# EAGLE board StepperController_v1-0 (EAGLE 7.5.0)
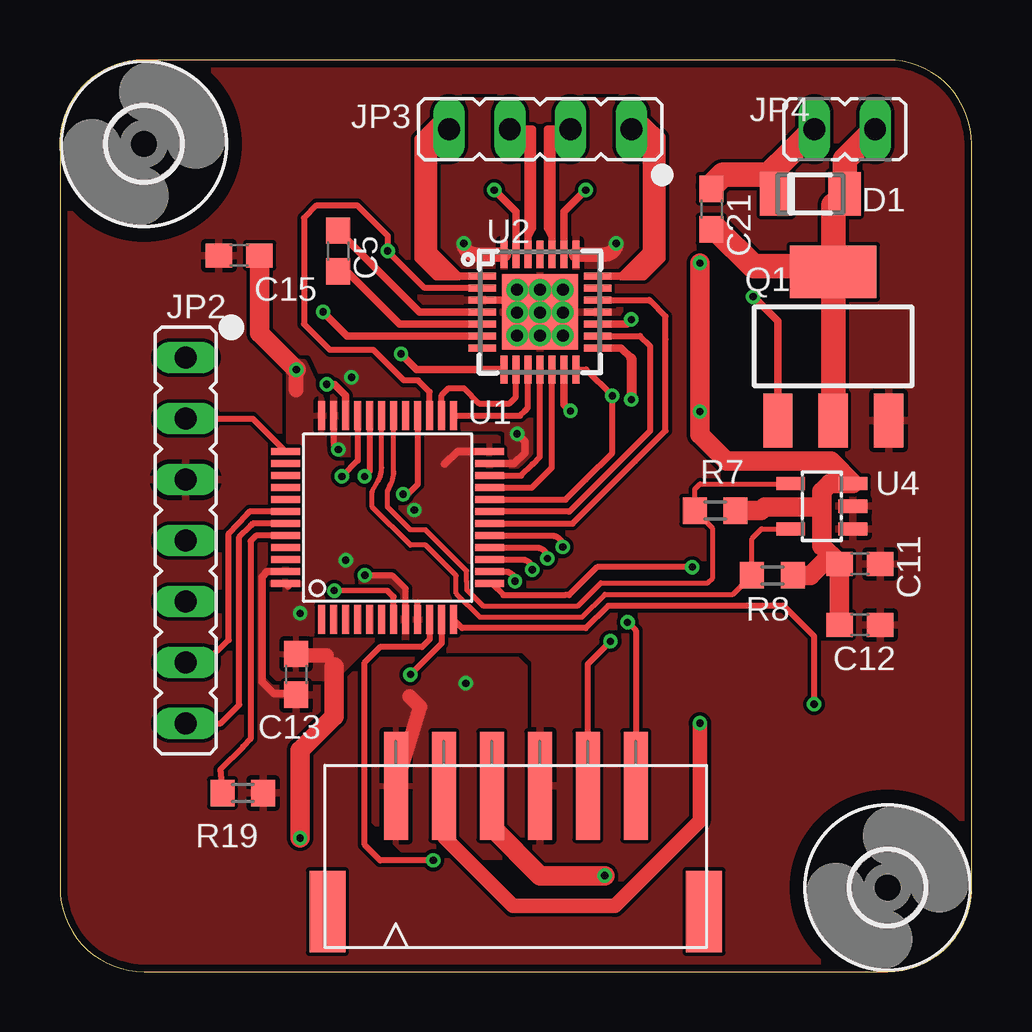
[diagram p0: board, top side]
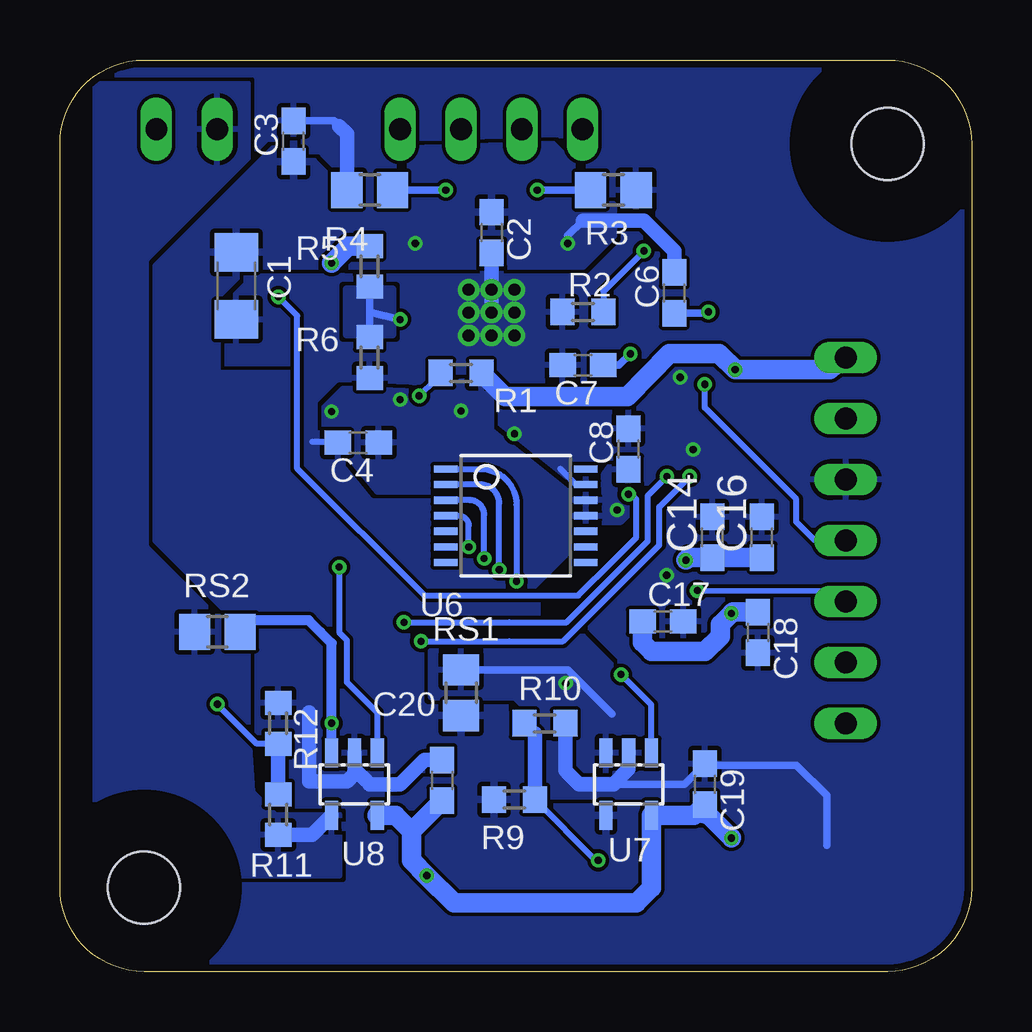
[diagram p1: board, bottom side, seen from below]

Size 38 x 38 mm. Coordinates in mm from the lower left corner, seen from the top.
Outline: 0,34.5 0,3.5 arc90 3.5,0 34.5,0 arc90 38,3.5 38,34.5 arc90 34.5,38 3.5,38 arc90 0,34.5
Copper layers (1*16): Top 0.035mm / dielectric 1.5mm / Bottom 0.035mm
Design rules "PCB-POOL Standard": minimum track width 0.15mm, minimum drill 0.3mm, track to track 0.15mm, track to pad 0.15mm, pad to pad 0.15mm, via to via 0.15mm, smd to smd 0.15mm, copper to edge 0.3mm, drill to drill 0.2mm, minimum pad ring 0.2mm, minimum via ring 0.15mm, stop-mask expansion 0.075mm, vias tented up to drill 0mil, thermal gap 0.2mm

## Footprints (pad centres in the part's own frame; a part is rotated, then mirrored left to right if it is on the bottom)
C1206 = smd 1.6 x 1.8: 1 -1.4,0; 2 1.4,0
C0603 = smd 1.1 x 1: 1 -0.85,0; 2 0.85,0
SOD123F = smd 1.34 x 1.8: A 1.43,0; C -1.43,0
3,0 = hole 3: 0,0
S6B-PH-SM4-TB = smd 1 x 4.5: 1 5,-6.75; 2 3,-6.75; 3 1,-6.75; 4 -1,-6.75; 5 -3,-6.75; 6 -5,-6.75 | smd 1.5 x 3.4: M1 -7.85,-1.5; M2 7.85,-1.5
JP7 = drill 0.914 long: 1 -7.62,0; 2 -5.08,0; 3 -2.54,0; 4 0,0; 5 2.54,0; 6 5.08,0; 7 7.62,0
JP4 = drill 0.914 long: 1 -3.81,0; 2 -1.27,0; 3 1.27,0; 4 3.81,0
JP1Y = drill 0.914 long: 1 0,-1.27; 2 0,1.27
SOT223 = smd 1.219 x 2.235: 1 -2.311,-3.099; 2 0,-3.099; 3 2.311,-3.099 | smd 3.6 x 2.2: 4 0,3.099
R0603 = smd 1 x 1.1: 1 -0.85,0; 2 0.85,0
R0805 = smd 1.3 x 1.5: 1 -0.95,0; 2 0.95,0
LQFP48 = smd 0.3 x 1.2: 1 -2.75,-4.25; 2 -2.25,-4.25; 3 -1.75,-4.25; 4 -1.25,-4.25; 5 -0.75,-4.25; 6 -0.25,-4.25; 7 0.25,-4.25; 8 0.75,-4.25; 9 1.25,-4.25; 10 1.75,-4.25; 11 2.25,-4.25; 12 2.75,-4.25; 25 2.75,4.25; 26 2.25,4.25; 27 1.75,4.25; 28 1.25,4.25; 29 0.75,4.25; 30 0.25,4.25; 31 -0.25,4.25; 32 -0.75,4.25; 33 -1.25,4.25; 34 -1.75,4.25; 35 -2.25,4.25; 36 -2.75,4.25 | smd 1.2 x 0.3: 13 4.25,-2.75; 14 4.25,-2.25; 15 4.25,-1.75; 16 4.25,-1.25; 17 4.25,-0.75; 18 4.25,-0.25; 19 4.25,0.25; 20 4.25,0.75; 21 4.25,1.25; 22 4.25,1.75; 23 4.25,2.25; 24 4.25,2.75; 37 -4.25,2.75; 38 -4.25,2.25; 39 -4.25,1.75; 40 -4.25,1.25; 41 -4.25,0.75; 42 -4.25,0.25; 43 -4.25,-0.25; 44 -4.25,-0.75; 45 -4.25,-1.25; 46 -4.25,-1.75; 47 -4.25,-2.25; 48 -4.25,-2.75
QFN-28-5MM = smd 1.15 x 0.3: 1 -2.4,1.5; 2 -2.4,1; 3 -2.4,0.5; 4 -2.4,0; 5 -2.4,-0.5; 6 -2.4,-1; 7 -2.4,-1.5; 15 2.4,-1.5; 16 2.4,-1; 17 2.4,-0.5; 18 2.4,0; 19 2.4,0.5; 20 2.4,1; 21 2.4,1.5 | smd 0.3 x 1.15: 8 -1.5,-2.4; 9 -1,-2.4; 10 -0.5,-2.4; 11 0,-2.4; 12 0.5,-2.4; 13 1,-2.4; 14 1.5,-2.4; 22 1.5,2.4; 23 1,2.4; 24 0.5,2.4; 25 0,2.4; 26 -0.5,2.4; 27 -1,2.4; 28 -1.5,2.4 | smd 3.15 x 3.15: 29 0,0
SOT23-5L = smd 0.55 x 1.2: 1 -0.95,-1.3; 2 0,-1.3; 3 0.95,-1.3; 4 0.95,1.3; 5 -0.95,1.3
TSSOP14 = smd 0.305 x 0.991: 1 -1.95,-2.918; 2 -1.3,-2.918; 3 -0.65,-2.918; 4 0,-2.918; 5 0.65,-2.918; 6 1.3,-2.918; 7 1.95,-2.918; 8 1.95,2.918; 9 1.3,2.918; 10 0.65,2.918; 11 0,2.918; 12 -0.65,2.918; 13 -1.3,2.918; 14 -1.95,2.918

## Placement (x,y rotation side)
C1  4.7uF  [C1206]  30.65,28.58 270 bottom
C2  0.1uF  [C0603]  20.01,30.8 270 bottom
C3  0.1uF  [C0603]  28.27,34.62 90 bottom
C4  0.22uF  [C0603]  25.57,22.05 180 bottom
C5  0.1uF  [C0603]  11.6,30.04 270 top
C6  0.1uF  [C0603]  12.39,28.29 90 bottom
C7  0.22uF  [C0603]  16.2,25.27 180 bottom
C8  100nF  [C0603]  14.29,21.78 90 bottom
C11  100nF  [C0603]  33.34,16.99 0 top
C12  10uF  [C0603]  33.34,14.45 0 top
C13  100nF  [C0603]  9.85,12.39 270 top
C14  100nF  [C0603]  10.8,18.11 90 bottom
C15  100nF  [C0603]  7.47,29.85 180 top
C16  4.7uF  [C0603]  8.74,18.11 90 bottom
C17  1uF  [C0603]  12.87,14.59 0 bottom
C18  10nF  [C0603]  8.9,14.14 270 bottom
C19  100nF  [C0603]  11.12,7.81 270 bottom
C20  100nF  [C0603]  22.07,7.97 270 bottom
C21  1nF  [C0603]  27.15,31.78 270 top
D1  SDM1U100S1F-7  [SOD123F]  31.28,32.42 0 top
H1  MOUNT-HOLE3.0  [3,0]  34.5,3.5 0 top
H2  MOUNT-HOLE3.0  [3,0]  3.5,34.5 0 top
JP1  BOARDINTERFACE  [S6B-PH-SM4-TB]  19,1 180 top
JP2  ST-LINK_UART  [JP7]  5.25,17.97 270 top
JP3  NEMA17  [JP4]  20.02,35.12 180 top
JP4  MC33873  [JP1Y]  32.71,35.12 270 top
Q1  STN4NF03  [SOT223]  32.23,26.07 0 top
R1  100k  [R0603]  21.28,24.95 0 bottom
R2  100k  [R0603]  16.2,27.5 0 bottom
R3  90mOhm+/-1%  [R0805]  14.93,32.58 180 bottom
R4  90mOhm+/-1%  [R0805]  25.09,32.58 0 bottom
R5  20k+/-1%  [R0603]  25.09,29.4 270 bottom
R6  7.5k+/-1%  [R0603]  25.09,25.59 270 bottom
R7  10k  [R0603]  27.31,19.22 0 top
R8  10k  [R0603]  29.69,16.52 0 top
R9  60.4k+/-1%  [R0603]  19.06,7.17 180 bottom
R10  12.1k+/-1%  [R0603]  17.79,10.35 180 bottom
R11  60.4k+/-1%  [R0603]  28.9,6.54 270 bottom
R12  40.2k+/-1%  [R0603]  28.9,10.35 270 bottom
R19  10k  [R0603]  7.63,7.45 180 top
RS1  0.05+/-1%  [R0805]  21.28,11.62 90 bottom
RS2  0.05+/-1%  [R0805]  31.44,14.16 0 bottom
U1  STM32L431CX  [LQFP48]  13.66,18.92 0 top
U2  A4988  [QFN-28-5MM]  20.01,27.5 0 top
U4  AD7315A  [SOT23-5L]  31.76,19.4 90 top
U6  AS5047D  [TSSOP14]  19,19 270 bottom
U7  CS30A  [SOT23-5L]  14.29,7.81 180 bottom
U8  CS30C  [SOT23-5L]  25.73,7.81 180 bottom

## Library data of the parts
C1-C8 C11-C21 R1-R12 R19 RS1 RS2 = resistor
D1 JP1-JP4 Q1 U1 U2 U4 U6-U8 = ()_StepperMotor_Library
H1 H2 = holes

## Nets
A4988_DIR: U1.18 U2.19
A4988_MS1: U1.26 U2.9
A4988_MS2: U1.25 U2.10
A4988_MS3: U1.22 U2.11
A4988_NENABLE: R2.2 U1.27 U2.2
A4988_NRESET: U1.21 U2.12
A4988_NSLEEP: R1.1 U1.20 U2.14
A4988_STEP: U1.19 U2.16
BOARD_12V: JP1.1 RS1.2 U7.3
CAN1_RX: JP1.6 U1.32
CAN1_TX: JP1.5 U1.33
FAN_CURRENT: U1.13 U8.1
FAN_POWER: C21.1 D1.C JP4.1 R11.2 RS2.1 U8.4
FAN_PWM: Q1.1 U1.28
FAN_VOLTAGE: R11.1 R12.2 U1.12
GND: C1.2 C2.2 C3.2 C4.2 C7.2 C8.2 C11.2 C12.2 C13.2 C14.2 C15.2 C16.2 C17.2 C18.2 C19.1 C20.1 JP1.4 JP2.3 Q1.3 R2.1 R3.1 R4.1 R6.2 R10.1 R12.1 R19.1 U1.8 U1.23 U1.35 U1.47 U2.3 U2.18 U2.29 U4.1 U4.2 U6.13 U7.2 U8.2
I2C1_SCL: R7.1 U1.30 U4.4
I2C1_SDA: R8.1 U1.31 U4.5
N$1: U1.38
N$2: U1.29
N$3: U1.45
N$4: U1.46
N$5: U1.5
N$6: U1.6
N$8: R19.2 U1.44
N$9: U1.1
N$10: R3.2 U2.27
N$11: C6.1 U2.6
N$12: C5.1 U2.4
N$13: C5.2 U2.5
N$14: R4.2 U2.23
N$15: C7.1 U2.8
N$16: R5.2 R6.1 U2.17
N$18: U6.7
N$19: U6.6
N$20: U6.14
N$21: U6.10
N$22: U6.9
N$23: U6.8
N$24: U6.5
N$32: C21.2 D1.A JP4.2 Q1.2 Q1.4
REG_3P3V: C4.1 C8.1 C11.1 C12.1 C13.1 C14.1 C15.1 C16.1 C17.1 C18.1 C19.2 C20.2 JP1.3 JP2.1 R1.2 R5.1 R7.2 R8.2 U1.9 U1.24 U1.36 U1.48 U2.13 U2.15 U4.3 U6.11 U6.12 U7.5 U8.5
REG_5V: JP1.2 RS2.2 U8.3
SPI1_MISO: U1.16 U6.3
SPI1_MOSI: U1.17 U6.4
SPI1_NSS: U1.14 U6.1
SPI1_SCK: U1.15 U6.2
STEPPER_1A: JP3.2 U2.24
STEPPER_1B: JP3.1 U2.21
STEPPER_2A: JP3.3 U2.26
STEPPER_2B: JP3.4 U2.1
STEPPER_CURRENT: U1.11 U7.1
STEPPER_POWER: C1.1 C2.1 C3.1 C6.2 R9.2 RS1.1 U2.22 U2.28 U7.4
STEPPER_VOLTAGE: R9.1 R10.2 U1.10
SYS_JTCK-SWCLK: JP2.2 U1.37
SYS_JTMS-SWDIO: JP2.4 U1.34
SYS_NRESET: JP2.5 U1.7
USART1_RX: JP2.7 U1.43
USART1_TX: JP2.6 U1.42

## Tracks (layer width: path | path; a pad name or v marks a point on that pad's centre or on a via)
A4988_DIR
  Top 0.254: U1.18 21.35,18.67 21.37,18.67 23.98,21.28 25.25,22.55 25.25,26.36 25.25,27.31 24.61,27.95 24.57,28 U2.19
A4988_MS1
  Top 0.254: U1.26 15.91,24.03 16.2,24.32 16.84,24.32 17.47,23.68 18.74,23.68 19.01,23.95 U2.9
A4988_MS2
  Top 0.254: U1.25 19.18,23.17 19.38,23.37 19.51,23.5 U2.10
A4988_MS3
  Top 0.254: U1.22 19.22,20.67 19.69,21.14 20.01,21.46 U2.11
A4988_NENABLE  (via drill 0.3)
  Top 0.254: U2.2 15.2,28.5 v13.66,30.04 13.66,30.67 12.39,31.94 10.7,31.94 10.17,31.41 10.17,27 11.26,25.91 11.44,25.91 13.06,25.91 14.34,24.64 14.93,24.64 15.41,24.16 U1.27
  Bottom 0.254: v13.66,30.04 15.35,28.34 R2.2
A4988_NRESET
  Top 0.254: U1.21 19.67,20.17 20.33,20.83 20.51,21.01 U2.12
A4988_NSLEEP  (via drill 0.3)
  Top 0.254: U2.14 21.93,25.09 v23.03,24 23.03,21.62 21.91,20.51 21.08,19.67 U1.20
  Bottom 0.254: 22.23,24.64 22.39,24.64 v23.03,24
  Bottom 0.305: 22.23,24.64 R1.1
A4988_STEP
  Top 0.254: U2.16 24.18,26.5 24.61,26.07 24.61,25.25 24.61,25.09 24.61,22.55 24.45,22.39 21.24,19.17 21.21,19.17 U1.19
BOARD_12V  (via drill 0.3)
  Top 0.61: JP1.1 15,11.04 14.57,11.46
  Bottom 0.305: RS1.2 16.82,12.57 15,10.75
  other vias: 16.91,12.02
  pour Top: 16.51,5.08 14.29,5.08 13.02,6.35 13.02,12.7 13.34,13.02 19.05,13.02 19.37,12.7 19.37,5.4 18.73,4.76 16.83,4.76
  pour Bottom: 13.34,8.89 13.34,11.11 16.19,13.97 22.54,13.97 22.54,11.75 22.54,11.43 19.05,11.43 17.14,9.53 17.14,8.26 16.83,7.94 14.61,7.94 14.29,7.94
CAN1_RX  (via drill 0.3)
  Top 0.254: U1.32 12.91,20.85 v12.7,20.64 | v23.66,14.56 24,14.22 JP1.6
  Bottom 0.254: v23.66,14.56 19.27,14.56 16.88,14.56 13.49,17.94 13.49,19.84 v12.7,20.64
CAN1_TX  (via drill 0.3)
  Top 0.254: U1.33 12.41,21.3 v11.75,20.64 | JP1.5 22,12.82 v22.95,13.76
  Bottom 0.254: v22.95,13.76 19.27,13.76 17.03,13.76 13.02,17.78 13.02,19.37 v11.75,20.64
FAN_CURRENT  (via drill 0.3)
  Top 0.254: v26.36,16.86 22.39,16.86 21.22,15.69 21.04,15.69 18.5,15.69 18.48,15.69 18,16.17
  Top 0.305: U1.13 18,16.17
  Bottom 0.254: v26.36,16.86 26.36,14.14 26.04,13.82 26.04,12.07 24.77,10.8 U8.1
FAN_POWER
  Top 0.61: 30.49,34.16 29.85,33.53 D1.C | C21.1 27.15,32.73
  Top 1.016: JP4.1 30.49,34.16 29.54,33.21 27.63,33.21 27.15,32.73
  Bottom 0.61: R11.2 27.5,5.69 U8.4
  pour Bottom (rank 3): 26.36,4 36.52,4 36.52,37.02 30.17,37.02 30.17,33.21 33.98,29.4 33.98,17.97 30.17,14.16 30.17,10.35 30,7.5 29.04,6.54 26.36,6.54
FAN_PWM  (via drill 0.3)
  Top 0.254: U1.28 14.91,20.31 14.5,19.9 v14.3,19.9
  Top 0.305: v28.9,28.13 29.92,27.11 Q1.1
  Bottom 0.254: v28.9,28.13 28.11,27.34 28.11,20.96 22.81,15.67 16.4,15.67 14.92,17.14 13.97,18.1 13.97,18.73 13.97,19.68 14.19,19.9 v14.3,19.9
FAN_VOLTAGE  (via drill 0.3)
  Top 0.254: U1.12 16.77,14.31 21.91,14.31 22.84,15.25 30.17,15.25 31.44,13.98 v31.44,11.14
  Bottom 0.254: R12.2 29.8,9.5 v31.44,11.14
  Bottom 0.61: R11.1 R12.2
GND  (via drill 0.3, 0.5)
  Top 0.254: U1.35 11.41,21.94 v11.6,21.76 | U1.8 14.41,15.97 13.87,16.51 v12.71,16.51 v12.71,16.52
  Top 0.305: U1.23 18.93,21.17 19.38,21.62 19.38,22.1 v19.06,22.41 | U1.47 8.64,16.67 8.42,16.45 8.42,12.07 8.9,11.6 9.77,11.6 | U2.3 19.06,28 v19.06,28.42
  Bottom 0.254: C4.2 26.44,22.07 27.47,22.07 | U6.13 16.49,20.3 17.14,20.95
  Bottom 0.305: 25.09,7.81 25.25,7.97 | U7.2 14.29,8.45 | 16.84,8.29 16.94,8.39 | 14.93,7.81 11.97,7.81 C19.1 11.06,8.6 7.31,8.6 6.04,7.33 6.04,5.27 | C3.2 26.57,35.47 26.36,35.25 | 23.82,7.81 23.82,7.79 23.82,7.81
  Bottom 0.61: C20.1 22.81,8.82 23.82,7.81 25.09,7.81 | 25.25,7.97 25.63,8.35 | 25.63,8.35 25.73,8.45 U8.2 | 14.29,8.45 14.93,7.81 16.36,7.81 16.84,8.29 | 16.94,8.39 R10.1 | R4.1 26.04,34.93 26.36,35.25 | C2.2 v20.01,28.42 20.01,27.63 | 27.62,10.79 27.62,7.94 26.04,7.94 25.63,8.35
  other vias: 12.15,24.77 20.96,28.42 20.96,27.47 20.01,27.47 19.06,27.47 19.06,26.52 20.01,26.52 20.96,26.52
  pour Top (rank 6): -1,-1.5 39.79,-1.5 39.29,38.79 -1,38.79
  pour Bottom (rank 6): -1.27,-1.77 40.02,-1.77 40.02,39.31 -1.27,39.31
I2C1_SCL
  Top 0.2: U4.4 30.44,20.33 26.68,20.33 26.46,20.11 R7.1 27.21,18.47 27.21,16.41 27,16.2 22.55,16.2 21.6,15.25 17.63,15.25 16.95,15.92 16.95,16.24 16.95,16.7 15.24,18.41 14.61,18.41 13.65,19.37 13.65,20 13.8,20.34 arc24 13.91,20.84 U1.30
I2C1_SDA
  Top 0.2: U4.5 29.24,18.45 28.84,18.05 R8.1 28.05,15.72 22.71,15.72 21.76,14.77 17.51,14.77 16.52,15.76 16.52,16.5 15.24,17.78 14.61,17.78 13.02,19.37 13.02,20 13.27,20.46 arc29 13.41,21 U1.31
N$8
  Top 0.254: U1.44 8.17,18.17 7.95,17.95 7.95,9.69 7.63,9.37 6.68,8.42 R19.2
N$10  (via drill 0.3)
  Top 0.305: U2.27 19.01,31.67 v18.11,32.58
  Bottom 0.305: v18.11,32.58 R3.2
N$11  (via drill 0.3)
  Top 0.305: U2.6 11.96,26.5 v10.97,27.5
  Bottom 0.305: C6.1 11.02,27.44 v10.97,27.5
N$12
  Top 0.305: U2.4 14.99,27.5 C5.1
N$13
  Top 0.305: C5.2 11.97,29.18 13.66,27.5 14.16,27 U2.5
N$14  (via drill 0.3)
  Top 0.305: U2.23 21.01,31.67 v21.91,32.58
  Bottom 0.305: v21.91,32.58 R4.2
N$15  (via drill 0.3)
  Top 0.305: U2.8 14.87,25.09 v14.22,25.75
  Bottom 0.305: C7.1 14.69,25.27 v14.22,25.75
N$16  (via drill 0.3)
  Top 0.305: U2.17 23.64,27 v23.82,27.18
  Bottom 0.305: v23.82,27.18 25.09,27.5 | R5.2 25.09,27.5 | R6.1 25.09,27.5
  pour Bottom (no thermals): 26.04,28.45 26.04,26.54 24.14,26.54 24.14,28.45
N$32
  Top 0.305: D1.A 32.23,31.94
  Top 0.61: C21.2 27.37,30.93 | 32,29.4 Q1.4
  Top 1.016: JP4.2 32.71,33.85 D1.A | 32.23,31.94 Q1.4 Q1.2 | 27.37,30.93 28.9,29.4 32,29.4
REG_3P3V  (via drill 0.3)
  Top 0.254: U1.9 14.91,15.39
  Top 0.305: U1.24 16.56,21.67 16.04,21.15 | 9.51,16.07 U1.48 | U2.15 23.39,26 23.82,25.57 | v21.28,23.37 21.01,23.64 U2.13
  Top 0.406: 23.82,25.57 v23.82,23.84
  Top 0.61: 9.85,24.23 v9.85,25.09 | 11.12,13.18 9.88,13.18
  Top 0.813: v10.01,5.56 10.01,9.21 11.43,10.64 11.43,12.7 | C15.1 8.32,26.62 v9.85,25.09 | C12.1 C11.1 32.13,17.36 | 31.76,19.38 31.76,20.01 32.1,20.35 U4.3 32.13,21.28 27.79,21.28 26.68,22.39 v26.68,23.34 v26.68,29.54 | 31.76,19.38 31.76,17.73 32.13,17.36 | R8.2 31.28,16.52 32.13,17.36 | R7.2 29.22,19.22 29.38,19.38 31.76,19.38 | JP1.3 18,6.01 20.01,4 v22.71,4
  Bottom 0.305: v23.82,23.84 23.82,23.82 | 11.81,17.25 v11.91,17.15
  Bottom 0.61: C20.2 22.07,7.02 | U8.5 24.75,6.54
  Bottom 0.813: JP2.1 5.91,25.09 v9.85,25.09 10.48,25.73 10.53,25.77 12.59,25.77 14.34,23.98 19.38,23.98 19.45,23.98 R1.2 | C16.1 C14.1 11.81,17.25 v11.91,17.15 | R5.1 25.96,30.25 v26.68,29.54 | C19.2 11.57,6.51 U7.5 13.35,3.48 13.97,2.86 21.57,2.86 v22.71,4 23.34,4.63 23.34,5.85 | v10.01,5.56 11.12,6.67 | 23.34,5.85 C20.2 | U8.5 24,6.51 23.34,5.85 | C18.1 9.95,14.99 v10.01,14.93 10.48,14.46 10.48,13.97 11.11,13.34 13.34,13.34 13.72,13.72 C17.1
  Bottom 1.016: 11.12,6.67 C19.2
  other vias: 14.77,19.24
  pour Top: 18.26,22.23 12.07,22.23 11.28,23.03 10.17,25.41 9.53,25.41 9.53,22.07 10.17,21.44 10.17,17.63 8.74,16.2 8.74,12.55 9.06,12.23 11.44,12.23 13.66,14.45 18.26,14.45
  pour Bottom: 14.93,21.28 15.88,20 16.84,20 16.84,20.01 20.01,22.55 20.01,24.61 21.28,24.61 22.07,24.14 26.2,24.3 27,23.5 27,22.71 24.77,20.01 19.53,20.01 19.22,19.53 19.22,16.52 18.74,16.04 18.26,16.04 15.56,18.74 14.61,18.74 14.29,19.06 14.29,20.64
REG_5V  (via drill 0.3)
  Top 0.61: v26.68,10.35 26.68,6.27 23.13,2.73 18.88,2.73 16,5.61 JP1.2
  Bottom 0.305: 30.01,14.64 RS2.2
  Bottom 0.406: U8.3 v26.68,10.35 26.68,13.68 27.15,14.16 27.63,14.64 30.01,14.64
SPI1_MISO  (via drill 0.3)
  Top 0.254: U1.16 19.87,17.67 arc-90 v20.32,17.22
  Bottom 0.254: v20.32,17.22 20.32,19.05 arc-90 20.92,19.65 U6.3
SPI1_MOSI  (via drill 0.3)
  Top 0.254: U1.17 20.49,18.17 arc-90 v20.96,17.7
  Bottom 0.254: v20.96,17.7 20.96,18.58 arc-90 21.38,19 U6.4
SPI1_NSS  (via drill 0.3)
  Top 0.254: U1.14 18.57,16.67 arc-90 v18.97,16.27
  Bottom 0.254: U6.1 20.46,20.95 arc90 18.97,19.46 v18.97,16.27
SPI1_SCK  (via drill 0.3)
  Top 0.254: U1.15 19.27,17.17 arc-90 v19.69,16.75
  Bottom 0.254: v19.69,16.75 19.69,19.52 arc-90 20.46,20.3 U6.2
STEPPER_1A
  Top 0.254: JP3.2
  Top 0.305: U2.24 20.51,34.34 arc-90 JP3.2 | 20.49,30.67 20.33,30.99 20.33,34.96 | 20.33,34.96 20.33,35.12 JP3.2 21.28,34.96 20.33,34.96
STEPPER_1B
  Top 0.254: 24.14,35.12 JP3.1
  Top 0.305: U2.21 23.41,29 23.38,28.96 | 23.38,28.96 24.45,30.04 24.45,34.49 JP3.1 | 23.38,28.96 24.34,28.96 25.09,29.72 25.09,34.48 25.09,34.8 24.45,35.43 23.82,35.43 JP3.1
  Top 0.61: 24.77,34.8 24.45,34.8 24.14,35.12 24.77,34.48 24.77,29.72 24.45,29.72 23.98,29.24 24.14,29.24 24.45,29.56
STEPPER_2A
  Top 0.254: JP3.3
  Top 0.305: U2.26 19.51,34.35 arc90 JP3.3 | 19.53,30.67 19.69,30.99 19.69,35.12 JP3.3 | JP3.3 18.74,34.96 19.53,34.96
STEPPER_2B
  Top 0.254: 15.31,34.55 14.93,34.16 14.93,33.98
  Top 0.305: U2.1 16.61,29 16.64,28.96 | 16.64,28.96 15.56,30.04 15.56,34.47 JP3.4 | 16.64,28.96 15.68,28.96 14.93,29.72 14.93,33.98 14.93,34.72 15.64,35.43 16.2,35.43 JP3.4
  Top 0.61: 15.88,35.12 15.31,34.55 15.25,34.48 15.25,30.04 15.25,29.88 15.88,29.24 16.04,29.24
STEPPER_CURRENT  (via drill 0.3)
  Top 0.254: U1.11 15.91,13.69 v14.61,12.38
  Bottom 0.254: U7.1 13.35,9.52 13.35,11.12 v14.61,12.38
STEPPER_POWER  (via drill 0.3)
  Top 0.61: U2.22 arc0 22.73,29.89 arc90 v23.18,30.35 | U2.28 arc0 17.29,29.89 arc-90 v16.84,30.35
  Bottom 0.305: 16.2,31.3 16.84,30.67 v16.84,30.35
  Bottom 0.61: C6.2 12.39,30.04 13.66,31.3 16.2,31.3
  pour Bottom (rank 2): 30.17,29.4 16.2,29.4 14.93,30.67 14.93,31.94 17.47,34.48 24.13,34.29 24.45,33.02 26.67,33.02 28.13,34.48 28.9,34.48 33.98,29.4 33.98,17.97 30.17,14.16 27.31,14.16 24.77,8.76 22.87,3.82 21.27,3.17 14.92,3.17 13.34,3.49 13.34,6.86 18.11,6.86 18.12,15.7 23.03,15.7 23.82,16.68 28.11,20.99 28.27,24.95 31.44,24.93 31.44,28.13
  pour Top: 14.91,36.29 25.07,36.29 25.09,29.4 14.93,29.4
STEPPER_VOLTAGE  (via drill 0.3)
  Top 0.254: U1.10 15.41,13.85 15.09,13.53 13.34,13.53 12.7,12.88 12.7,5.28 13.35,4.63 v15.56,4.63
  Bottom 0.254: v15.56,4.63 15.67,4.63 R9.1
  Bottom 0.305: R10.2 18.21,9.92
  Bottom 0.61: 18.21,9.92 R9.1
SYS_JTCK-SWCLK
  Top 0.254: JP2.2 8.03,23.05 U1.37
SYS_JTMS-SWDIO  (via drill 0.3)
  Top 0.305: U1.34 11.91,24.01 11.44,24.48 v11.12,24.48
  Bottom 0.254: JP2.4 6.54,17.97 7.31,18.74 7.31,19.69 11.12,23.5 v11.12,24.48
SYS_NRESET  (via drill 0.3)
  Top 0.254: U1.7 13.91,15.62 13.65,15.88 v11.43,15.88
  Bottom 0.254: v11.43,15.88 5.69,15.88 JP2.5
USART1_RX
  Top 0.254: JP2.7 6.7,10.35 7.47,11.12 7.47,18.11 7.95,18.58 8.04,18.67 U1.43
USART1_TX
  Top 0.254: JP2.6 6.06,12.89 7.03,13.82 7.03,18.26 7.79,19.06 7.9,19.17 U1.42